# Altium PCB riego.PcbDoc
Units mm, origin at the board's own origin, x right, y up, seen from the top; angles counter-clockwise.
Board outline 75.31 x 78.36 mm, 2 copper layers (Top Layer, Bottom Layer); 81 components, 63 nets, 286 pads, 47 vias.
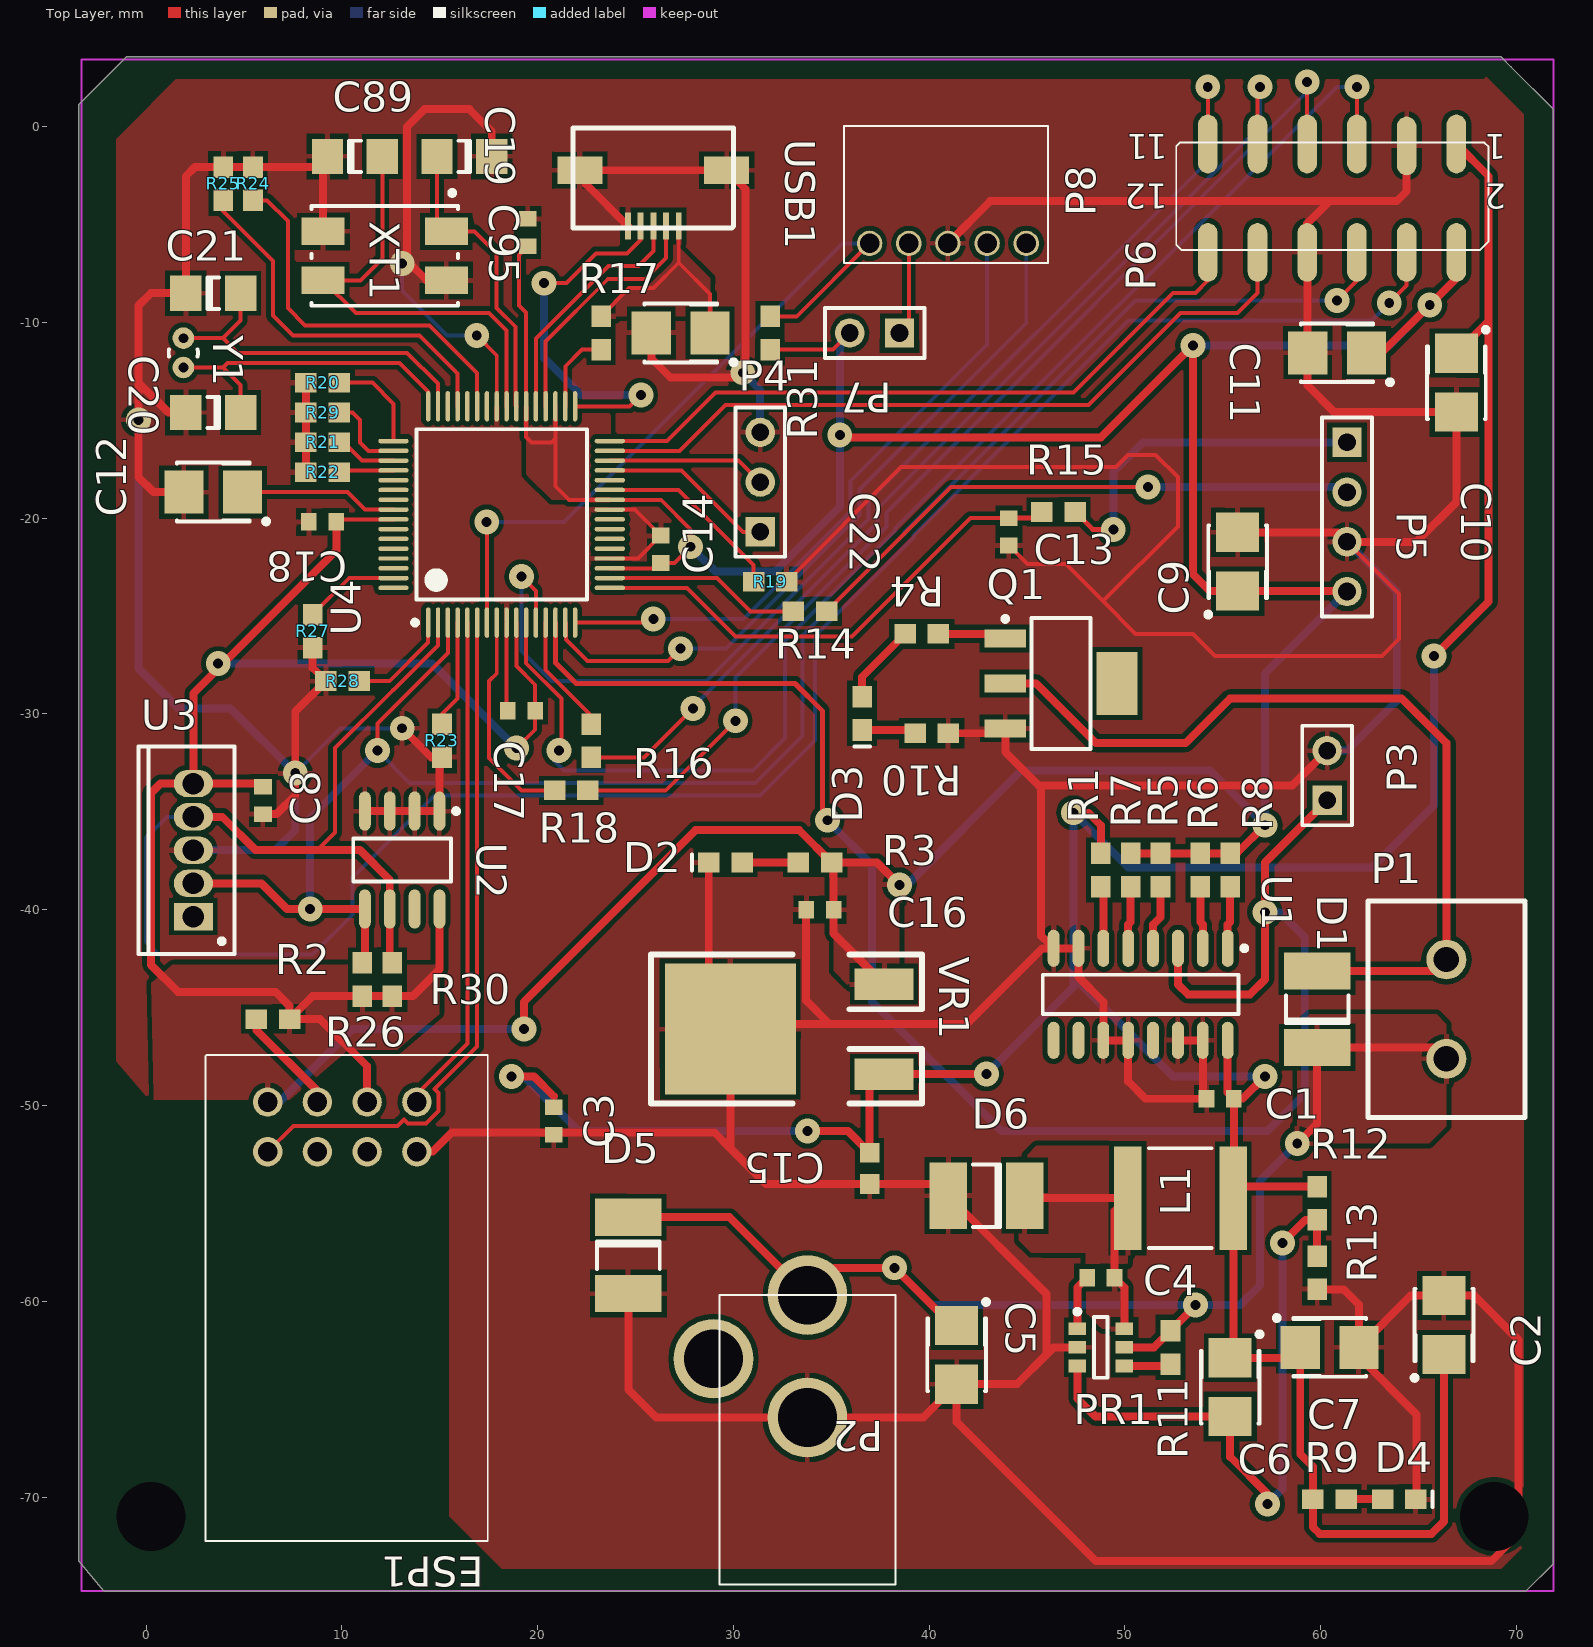
[diagram p0: Top Layer view]
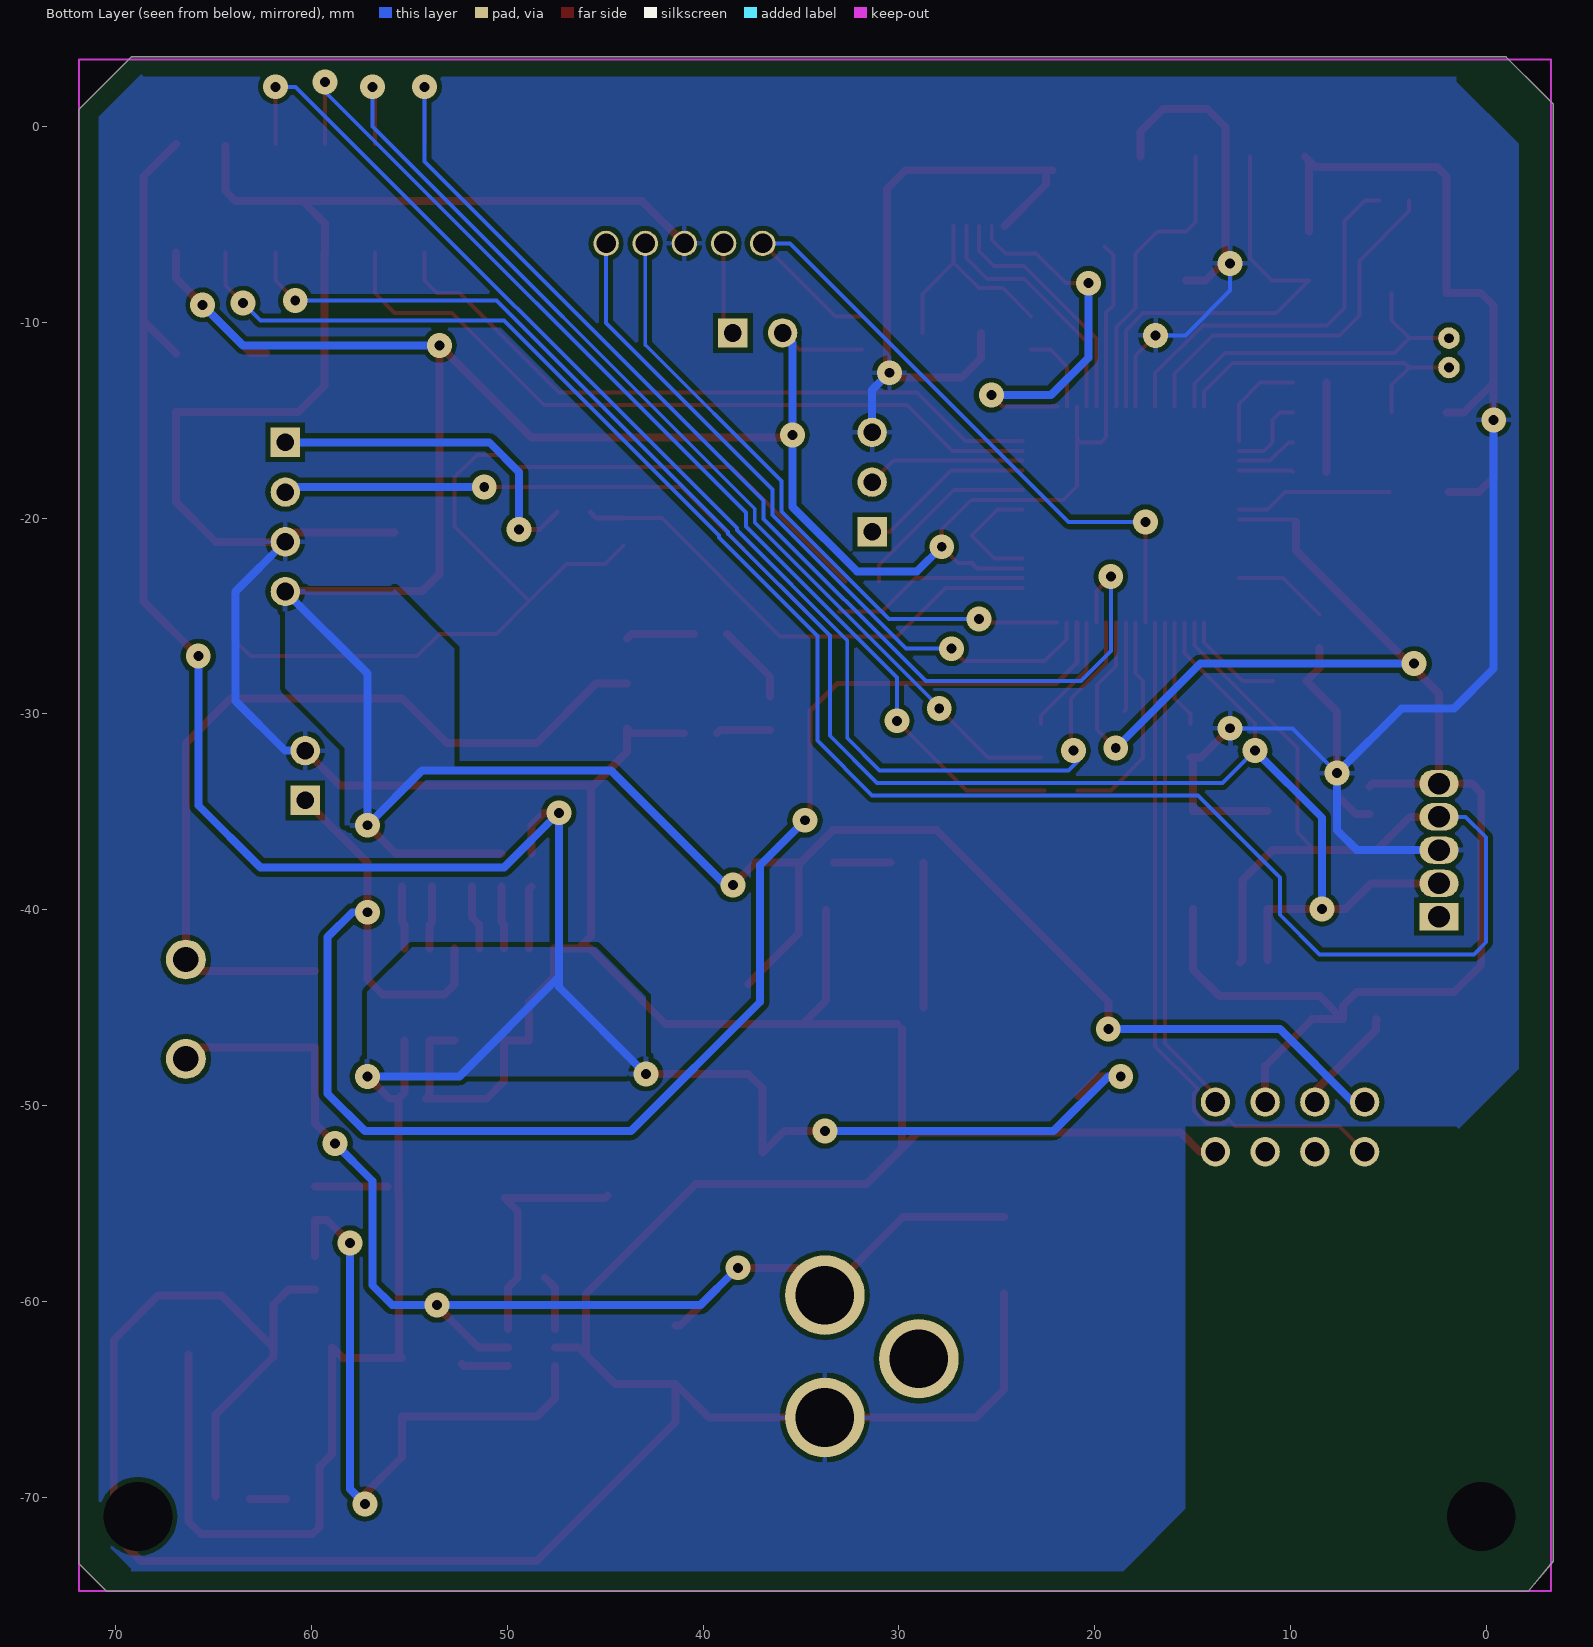
[diagram p1: Bottom Layer view, seen from below]

## Layer stack, top to bottom
Top Layer: signal copper 0.0356
Dielectric: dielectric 0.32, FR-4, Dk 4.8
Bottom Layer: signal copper 0.0356

## Board outline
-2.159,-74.803 70.485,-74.803 71.882,-73.406 71.882,0.889 69.723,3.048 69.215,3.556 11.557,3.556 -1.016,3.556 -2.921,1.651 -3.429,1.143 -3.429,-73.279

## Design rules (kind name [scope] priority, off if disabled: settings)
Clearance [All] p1: gap=0.254
ComponentClearance [All] p1: gap=0.254 collisioncheckmode=3 verticalgap=0 showdistances=FALSE
HoleSize [All] p1: absolutevalues=TRUE maxlimit=3.048 minlimit=0.025 maxpercent=80.000 minpercent=20.000
MinimumSolderMaskSliver [All] p1 off: minsoldermaskwidth=0.254
PolygonConnect [All] p1: connectstyle=Relief reliefconductorwidth=0.254 reliefentries=4 polygonreliefangle="90 Angle"
RoutingVias [All] p1: holewidth=0.254 width=1.27 viastyle="Through Hole" minholewidth=0.254 minwidth=0.508 maxholewidth=0.508 maxwidth=2.032
SilkToSilkClearance [All] p1 off: silktosilkclearance=0.254
SilkscreenOverComponentPads [All] p1 off: minsilkscreentomaskgap=0.254
SolderMaskExpansion [All] p1: expansion=0.102
TestPointUsage [All] p1: valid=0 allowmultiple=FALSE
Testpoint [All] p1: side=15 testpointundercomponent=TRUE minsize=1.016 maxsize=2.54 preferedsize=1.524 minholesize=0 maxholesize=1.016 preferedholesize=0.813 testpointgrid=0.025 style=1023 order=0123456789
Width Width_1 [InComponent(U1)] p1: maxlimit=0.254 minlimit=0.203 preferedwidth=0.203
Width [All] p2: maxlimit=0.508 minlimit=0.203 preferedwidth=0.254
19 further rules are at their usual default settings.

## Components (designator, comment, footprint, x,y, rotation, side; value= is the part's Value field where it differs from the comment)
C1 "Cap Semi" CAPC1608L 54.864,-49.657 r0 top
C2 "" TC3528-1411 66.294,-61.214 r90 top
C3 "Cap Semi" CAPC1608L 20.828,-50.8 r90 top
C4 "Cap Semi" CAPC1608L 48.768,-58.801 r180 top
C5 "" TC3528-1411 41.402,-62.738 r270 top
C6 "" TC3528-1411 55.372,-64.389 r270 top
C7 "" TC3528-1411 60.452,-62.357 r0 top
C8 "Cap Semi" CAPC1608L 5.969,-34.417 r90 top
C9 "" TC3528-1411 55.753,-22.225 r90 top
C10 "" TC3528-1411 66.929,-13.081 r270 top
C11 "" TC3528-1411 60.833,-11.557 r180 top
C12 "" TC3528-1411 3.429,-18.669 r180 top
C13 "Cap Semi" CAPC1608L 44.069,-20.701 r90 top
C14 "Cap Semi" CAPC1608L 26.289,-21.59 r270 top
C15 "C_VDD" CAPC1608N 36.957,-53.213 r270 top
C16 "C_VDD" CAPC1608L 34.417,-40.005 r180 top
C17 "Cap Semi" CAPC1608L 19.177,-29.845 r0 top
C18 "Cap Semi" CAPC1608L 9.017,-20.193 r0 top
C19 "Cap Semi" CAPC1608L 19.489,-5.415 r270 top
C20 "Cap Semi" C1206 3.429,-14.605 r180 top
C21 "Cap Semi" C1206 3.429,-8.509 r0 top
C22 "" TC3528-1411 27.305,-10.541 r180 top
C89 "Cap Semi" C1206 10.668,-1.524 r0 top
C95 "Cap Semi" C1206 16.256,-1.524 r180 top
D1 "Diode" CD4532-1812 59.817,-45.085 r270 top
D2 "Ledred" CD1608-0603 29.591,-37.592 r180 top
D3 "Ledred" CD1608-0603 36.576,-29.972 r270 top
D4 "Ledgreen" CD1608-0603 64.008,-70.104 r0 top
D5 "D Zener" CD4532-1812 24.638,-57.658 r90 top
D6 "B230A" CD4532-1812 42.926,-54.61 r0 top
ESP1 "ESP8266" ESP8266 12.192,-70.104 r270 top
L1 "774-2720" INDC5750N 52.832,-54.737 r0 top
P1 "pump" Headerx2_5.08 66.421,-45.085 r90 top
P2 "Supply" JACK_POWER 33.782,-59.69 r270 top
P3 "LDR" HDR1X2 60.325,-34.417 r90 top
P4 "Debug" HDR1X3 31.369,-20.701 r90 top
P5 "Soil_meas" HDR1X4 61.341,-16.129 r270 top
P6 "Header 6X2" HEADER_SMD_6x2 66.929,-0.889 r180 top
P7 "jumper" HDR1X2 38.481,-10.541 r180 top
P8 "Programador" Header_prog 36.957,-5.969 r0 top
PR1 "AP5100" SOT26A-6L 48.768,-62.357 r0 top
Q1 "MJE340" SOT223-4L 46.736,-28.448 r0 top
R1 "Res3" J1-0603 48.768,-37.973 r90 top
R2 "Res3" J1-0603 6.477,-45.593 r0 top
R3 "Res3" J1-0603 34.163,-37.592 r0 top
R4 "Res3" J1-0603 39.624,-25.908 r0 top
R5 "Res3" J1-0603 51.816,-37.973 r90 top
R6 "Res3" J1-0603 53.848,-37.973 r90 top
R7 "Res3" J1-0603 50.292,-37.973 r90 top
R8 "Res3" J1-0603 55.372,-37.973 r90 top
R9 "Res3" J1-0603 60.452,-70.104 r0 top
R10 "Res3" J1-0603 40.132,-30.988 r180 top
R11 "Res3" J1-0603 52.324,-62.357 r90 top
R12 "Res3" J1-0603 59.817,-54.991 r90 top
R13 "Res3" J1-0603 59.817,-58.547 r90 top
R14 "Res3" J1-0603 33.909,-24.765 r180 top
R15 "Res3" J1-0603 46.609,-19.685 r180 top
R16 "Res3" J1-0603 22.733,-31.369 r90 top
R17 "Res3" J1-0603 23.241,-10.541 r90 top
R18 "Res3" J1-0603 21.717,-33.909 r0 top
R19 "Res3" J1-0603 31.877,-23.241 r0 top
R20 "Res3" J1-0603 9.017,-13.081 r180 top
R21 "Res3" J1-0603 9.017,-16.129 r180 top
R22 "Res3" J1-0603 9.017,-17.653 r180 top
R23 "Res3" J1-0603 15.113,-31.369 r90 top
R24 "Res3" J1-0603 5.461,-2.921 r90 top
R25 "Res3" J1-0603 3.937,-2.921 r90 top
R26 "Res3" J1-0603 11.049,-43.561 r270 top
R27 "Res3" J1-0603 8.509,-25.781 r270 top
R28 "Res3" J1-0603 10.033,-28.321 r180 top
R29 "Res3" J1-0603 9.017,-14.605 r180 top
R30 "Res3" J1-0603 12.573,-43.561 r270 top
R31 "Res3" J1-0603 31.877,-10.541 r90 top
U1 "827-0361" SO16_L 50.8,-44.323 r270 top
U2 "M24C02MN6" SOP8_N 13.081,-37.465 r270 top
U3 "TC74A2-3.3VAT" TO-220-AT5 2.413,-36.957 r90 top
U4 "PIC24FJ64GB106-I/PT" TQFP-PT64_L 18.161,-19.812 r90 top
USB1 "Micro_USB" micro_usb 25.908,-5.08 r180 top
VR1 "751-5192" DPAK 29.845,-46.101 r0 top
XT1 "XTAL_SMD" 12SMXB-14SMX 12.192,-6.604 r180 top
Y1 "32.768" BCY-W2/D1.5 1.905,-11.557 r180 top

## Footprints (in the part's own frame and the unit in brackets; to place one, negate y for a bottom-side part, rotate by r counter-clockwise, add the part's x,y. Pads: shape width x height; smd on the part's side, far side on the other; paste and mask are expansions set on the pad)
12SMXB-14SMX [mm] "Quartz Crystal, SM; Body 7.5 x 5.1 mm (LxW max)"
  rect 2.2x1.4 smd: 1(-3.15,-1.25) 2(-3.15,1.25) 3(3.15,1.25) 4(3.15,-1.25)
  silkscreen extent -3.75,-3.34 3.75,2.55
BCY-W2/D1.5 [mm] "Crystal, Thru-Hole; 2 Leads; Body 1.5 x 5.1 mm (Dia.xH)"
  round 1.1 hole 0.5: 1(0,0.75) 2(0,-0.75)
  silkscreen extent -0.75,-0.18 0.75,0.18
C1206 [mm] "Chip Capacitor; Body 3.2 x 1.6 mm (LxW typ)"
  rect 1.6x1.8 smd: 1(-1.4,0) 2(1.4,0)
  silkscreen extent -0.3,-0.8 0.3,0.8
CAPC1608L [mm] "Chip Capacitor, Body 1.6x0.8mm, IPC High Density"
  rect 0.8x0.9 smd: 1(-0.7,0) 2(0.7,0)
  body extent -0.87,-0.48 0.87,0.48, height 0.85
CAPC1608N [mm] "Chip Capacitor, Body 1.6x0.8mm, IPC Medium Density"
  rect 1x1 smd: 1(-0.8,0) 2(0.8,0)
  body extent -0.87,-0.48 0.87,0.48, height 0.85
CD1608-0603 [mm] "Chip Diode; Body 1.6 x 0.8 mm (LxW typ)"
  rect 1.1x1 smd: 1(-0.85,0) 2(0.85,0)
  silkscreen extent 1.7,-0.4 1.7,0.4
CD4532-1812 [mm] "Chip Diode; Body 4.5 x 3.2 mm (LxW typ)"
  rect 1.9x3.4 smd: 1(-1.95,0) 2(1.95,0)
  silkscreen extent -0.7,-1.6 0.7,1.6
DPAK [mm]
  rect 3x1.6 smd: 1(7.85,-2.3) 3(7.85,2.3)
  rect 6.7x6.7 smd: 2(0,0)
  silkscreen extent -4.06,-3.81 9.78,3.81
ESP8266 [mm] "ESP8266"
  round 1.5 hole 1: 1(-17.74,-5.98) 2(-20.28,-5.98) 3(-17.74,-3.44) 4(-20.28,-3.44) 5(-17.74,-0.9) 6(-20.28,-0.9) 7(-17.74,1.64) 8(-20.28,1.64)
  silkscreen extent -22.67,-9.16 2.15,5.26
HDR1X2 [mm] "Connector; Header; 2 Position"
  rect 1.5x1.5 hole 0.9: 1(0,0)
  round 1.5 hole 0.9: 2(2.54,0)
  silkscreen extent -1.27,-1.27 3.81,1.27
HDR1X3 [mm] "Connector; Header; 3 Position"
  rect 1.5x1.5 hole 0.9: 1(0,0)
  round 1.5 hole 0.9: 2(2.54,0) 3(5.08,0)
  silkscreen extent -1.27,-1.27 6.35,1.27
HDR1X4 [mm] "Connector; Header; 4 Position"
  rect 1.5x1.5 hole 0.9: 1(0,0)
  round 1.5 hole 0.9: 2(2.54,0) 3(5.08,0) 4(7.62,0)
  silkscreen extent -1.27,-1.27 8.89,1.27
Header_prog [mm]
  round 1.3 hole 1: 1(0,0) 2(2,0) 3(4,0) 4(6,0) 5(8,0)
  silkscreen extent -1.32,-1 9.1,6
HEADER_SMD_6x2 [mm]
  oval 1x3 smd: 1(0,0) 2(0,5.54) 3(2.54,0.1) 4(2.54,5.54) 5(5.08,0) 6(5.08,5.54) 7(7.62,0) 8(7.62,5.54) 9(10.16,0) 10(10.16,5.54) 11(12.7,0) 12(12.7,5.54)
  silkscreen extent -1.65,-0.07 14.31,5.42
Headerx2_5.08 [mil] "408-7871 rs"
  round 80 hole 51.18: 1(-100,0) 2(100,0)
  silkscreen extent -218,-157 218,157
INDC5750N [mm] "Chip Inductor, Body 5.7x5.0mm, IPC Medium Density"
  rect 1.4x5.3 smd: 1(-2.7,0) 2(2.7,0)
  silkscreen extent -1.6,-2.55 1.6,2.55, body extent -2.95,-2.65 2.95,2.65, height 1.9
J1-0603 [mm] "Chip Resistor; Body 1.6 x 0.8 mm (LxW typ)"
  rect 1.1x1 smd: 1(-0.85,0) 2(0.85,0)
JACK_POWER [mm]
  round 4.064 hole 3: 0(3.25,-4.8) 1(6.25,0) 2(0,0)
  silkscreen extent 0,-4.5 14.78,4.5
micro_usb [mm] "714-2344"
  rect 0.305x1.4 smd: 1(-1.3,0) 2(-0.65,0) 3(0,0) 4(0.65,0) 5(1.3,0)
  rect 2.3x1.4 smd: 6(-3.75,-2.85) 7(3.75,-2.85)
  silkscreen extent -4.1,-5 4.1,0.1
SO16_L [mm] "SOIC, 16-Leads, Body 9.9x3.9mm, Pitch 1.27mm, IPC High Density"
  oval 1.9x0.6 smd: 1(-2.35,4.445) 2(-2.35,3.175) 3(-2.35,1.905) 4(-2.35,0.635) 5(-2.35,-0.635) 6(-2.35,-1.905) 7(-2.35,-3.175) 8(-2.35,-4.445) 9(2.35,-4.445) 10(2.35,-3.175) 11(2.35,-1.905) 12(2.35,-0.635) 13(2.35,0.635) 14(2.35,1.905) 15(2.35,3.175) 16(2.35,4.445)
  silkscreen extent -2.47,-5 1,5.42, body extent -1.95,-4.95 1.95,4.95, height 1.75
SOP8_N [mm] "SOIC, 8-Leads, Body 4.9x3.9mm, Pitch 1.27mm, IPC Medium Density"
  oval 2x0.6 smd: 1(-2.5,1.905) 2(-2.5,0.635) 3(-2.5,-0.635) 4(-2.5,-1.905) 5(2.5,-1.905) 6(2.5,-0.635) 7(2.5,0.635) 8(2.5,1.905)
  silkscreen extent -2.62,-2.5 1.1,2.88, body extent -2,-2.5 2,2.5, height 1.75
SOT26A-6L [mm] "SOT23, 6-Leads, Body 2.9x1.7mm, Pitch 0.95mm, Lead Span 2.8mm, IPC High Density"
  rect 0.9x0.65 smd: 1(-1.2,0.95) 2(-1.2,0) 3(-1.2,-0.95) 4(1.2,-0.95) 5(1.2,0) 6(1.2,0.95)
  silkscreen extent -1.32,-1.55 0.35,1.95, body extent -0.9,-1.55 0.9,1.55, height 1.45
SOT223-4L [mm] "SOT223, 4-Leads, Body 6.5x3.5mm, Pitch 2.3mm, Lead Span 7mm, IPC High Density"
  rect 2.1x0.9 smd: 1(-2.85,2.3) 2(-2.85,0) 3(-2.85,-2.3)
  rect 2.1x3.2 smd: 4(2.85,0)
  silkscreen extent -2.97,-3.35 1.5,3.42, body extent -1.85,-3.35 1.85,3.35, height 1.8
TC3528-1411 [mm] "Capacitor, SM Tantalum; Body 3.5 x 2.8 mm (LxW typ)"
  rect 2x2.2 smd: 1(-1.5,0) 2(1.5,0)
  silkscreen extent -2.82,-1.5 1.85,1.62
TO-220-AT5 [mm] "TO, Thru-Hole, Vertical, Heatsink Mounted; 5 In-Line Leads; Pitch 1.70 mm"
  rect 1.4x2 hole 1.1: 1(-3.4,0)
  oval 1.4x2 hole 1.1: 2(-1.7,0) 3(0,0) 4(1.7,0) 5(3.4,0)
  silkscreen extent -5.3,-2.1 5.3,2.8, body extent -5.35,-2.15 5.35,2.85, height 20.6
TQFP-PT64_L [mm] "Thin QFP, 64-Leads, Body 10x10mm, Pitch 0.5mm, IPC High Density"
  oval 1.55x0.229 smd: 1(-5.525,3.75) 2(-5.525,3.25) 3(-5.525,2.75) 4(-5.525,2.25) 5(-5.525,1.75) 6(-5.525,1.25) 7(-5.525,0.75) 8(-5.525,0.25) 9(-5.525,-0.25) 10(-5.525,-0.75) 11(-5.525,-1.25) 12(-5.525,-1.75) 13(-5.525,-2.25) 14(-5.525,-2.75) 15(-5.525,-3.25) 16(-5.525,-3.75) 33(5.525,-3.75) 34(5.525,-3.25) 35(5.525,-2.75) 36(5.525,-2.25) 37(5.525,-1.75) 38(5.525,-1.25) 39(5.525,-0.75) 40(5.525,-0.25) 41(5.525,0.25) 42(5.525,0.75) 43(5.525,1.25) 44(5.525,1.75) 45(5.525,2.25) 46(5.525,2.75) 47(5.525,3.25) 48(5.525,3.75)
  oval 0.229x1.55 smd: 17(-3.75,-5.525) 18(-3.25,-5.525) 19(-2.75,-5.525) 20(-2.25,-5.525) 21(-1.75,-5.525) 22(-1.25,-5.525) 23(-0.75,-5.525) 24(-0.25,-5.525) 25(0.25,-5.525) 26(0.75,-5.525) 27(1.25,-5.525) 28(1.75,-5.525) 29(2.25,-5.525) 30(2.75,-5.525) 31(3.25,-5.525) 32(3.75,-5.525) 49(3.75,5.525) 50(3.25,5.525) 51(2.75,5.525) 52(2.25,5.525) 53(1.75,5.525) 54(1.25,5.525) 55(0.75,5.525) 56(0.25,5.525) 57(-0.25,5.525) 58(-0.75,5.525) 59(-1.25,5.525) 60(-1.75,5.525) 61(-2.25,5.525) 62(-2.75,5.525) 63(-3.25,5.525) 64(-3.75,5.525)
  silkscreen extent -5.65,-4.35 4.35,4.55, body extent -5,-5 5,5, height 1.2

## Part data
C1 C3 C4 C8 C13 C14 C17 C18 C19 C20 C21 C89 C95: "Capacitor (Semiconductor SIM Model)"
C2 C5 C6 C7 C9 C10 C11 C12 C15 C16 C22: library part "Cap Pol1", "Polarized Capacitor (Radial)"
D1: "Default Diode"
D2 D3 D4: library part LED3, "Typical BLUE SiC LED"
D5: "Zener Diode"
D6: library part "D Zener", "Zener Diode"
L1: library part Inductor, "Inductor"
P1 P2 P3 P7: library part "Header 2", "Header, 2-Pin"
P4: library part "Header 3", "Header, 3-Pin"
P5: library part "Header 4", "Header, 4-Pin"
P6: "Header, 6-Pin, Dual row"
P8: library part "Header 5", "Header, 5-Pin"
PR1: "Step down converter (751-3005)"
Q1: "Complementary Silicon Power Transistor"
R1 R2 R3 R4 R5 R6 R7 R8 R9 R10 R11 R12 R13 R14 R15 R16 R17 R18 R19 R20 R21 R22 R23 R24 R25 R26 R27 R28 R29 R30 R31: "Resistor"
U1: library part M74HC4052M1R, "Analog Multiplexer/Demultiplexer Dual 4-Channel"
U2: "2Kbit Serial I²C Bus EEPROM"
U3: "Tiny Serial Digital Thermal Sensor, 5-Pin TO-220, Extended Temperature"
U4: "General Purpose 16-Bit Flash Microcontroller with USB On-The-Go, 64KB Flash, 16KB SRAM, 64-Pin TQFP, Industrial Temperature"
VR1: library part "Volt Reg", "Voltage Regulator"
Y1: library part XTAL, "Crystal Oscillator"

## Free pads (board coordinates)
  round 1.3 hole 3.51: 0(0.254,-70.993) 1(68.864,-70.993)

## Via types
v1: diameter 1.27, hole 0.508, Top Layer to Bottom Layer, 47 vias

## Nets (pads, with @x,y where several pads share a name; then routed paths per layer and width w, separated by ;. In a path a pad name is that pad's centre, name@x,y a point inside that pad or via, vN(x,y) a via of type N, cw(c..) or ccw(c..) an arc to the next point about the centre after c; other vN are vias at no path point)
\M\C\L\R\: P8.1 R31.2 U4.7 | length 37.2
  Top Layer w0.203: v1(17.399,-20.193) 17.411,-20.205 U4.7 ; R31.2 33.235,-9.691 P8.1
  Bottom Layer w0.203: v1(17.399,-20.193) 21.336,-20.193 35.56,-5.969 P8.1
\M\U\X\_\E\N\: R1.1 U1.6 | length 3.2
  Top Layer w0.406: R1.1 48.895,-38.95 U1.6
A1_EXP: P6.11 U4.12 | length 60.4
  Top Layer w0.203: v1(19.177,-22.987) 19.911,-23.721 U4.12 ; P6.11 v1(54.229,2.032)
  Bottom Layer w0.203: v1(19.177,-22.987) 19.177,-26.797 20.701,-28.321 28.626,-28.321 36.906,-20.041 36.906,-19.101 54.229,-1.778 v1(54.229,2.032)
A2_EXP: P6.5 U4.11 | length 69.6
  Top Layer w0.203: U4.11 19.411,-27.412 21.209,-29.21 21.209,-31.75 v1(21.082,-31.877) ; P6.5 v1(61.849,2.032)
  Bottom Layer w0.203: v1(21.082,-31.877) 20.828,-32.131 20.828,-32.385 21.336,-32.893 30.988,-32.893 32.639,-31.242 32.639,-26.248 38.278,-20.609 38.278,-20.512 60.821,2.032 v1(61.849,2.032)
AO_SOIL: P5.1 R15.1 | length 17.8
  Top Layer w0.254: R15.1 48.348,-20.574 v1(49.403,-20.574)
  Bottom Layer w0.406: v1(49.403,-20.574) 49.403,-17.653 50.927,-16.129 P5.1
AP5100_FB: C6.2 PR1.3 R12.1 R13.2 | length 32.9
  Top Layer w0.406: PR1.3 47.568,-64.967 48.49,-65.889 C6.2 55.372,-67.945 57.277,-69.85 v1(57.277,-70.358) ; v1(58.039,-57.023) 59.221,-55.841 R12.1 R13.2
  Bottom Layer w0.406: v1(57.277,-70.358) 58.039,-69.596 v1(58.039,-57.023)
DIO1_EXP: P6.7 R18.2 | length 56.9
  Top Layer w0.203: R18.2 26.543,-33.909 v1(30.099,-30.353) ; P6.7 v1(59.309,2.286)
  Bottom Layer w0.203: v1(30.099,-30.353) 30.099,-28.142 37.821,-20.42 37.821,-19.71 59.309,1.778 v1(59.309,2.286)
DIO2_EXP: P6.9 R16.1 | length 53
  Top Layer w0.203: R16.1 25.439,-32.219 v1(27.94,-29.718) ; P6.9 56.769,1.905 v1(56.896,2.032)
  Bottom Layer w0.203: v1(27.94,-29.718) 27.94,-29.654 37.363,-20.231 37.363,-19.521 56.896,0.012 v1(56.896,2.032)
DO_SOIL: P5.2 R14.1 | length 29.3
  Top Layer w0.203: R14.1 41.109,-18.415 v1(51.181,-18.415)
  Bottom Layer w0.406: v1(51.181,-18.415) 61.087,-18.415 P5.2
ESP_RX: ESP1.8 U4.5 | length 25.1
  Top Layer w0.203: ESP1.8@13.843,-49.403 16.411,-46.835 U4.5
ESP_TX: ESP1.1 U4.6 | length 35.7
  Top Layer w0.203: ESP1.1 7.522,-51.054 12.839,-51.054 13.169,-50.724 13.374,-50.93 14.29,-50.93 14.938,-50.282 14.938,-49.366 14.732,-49.161 16.911,-46.982 U4.6
GND: C1.1 C2.2 C3.1 C5.2 C7.2 C8.1 C9.2 C10.2 C11.2 C12.2 C13.1 C14.1 C15.2 C16.2 C17.1 C18.1 C19.1 C20.2 C21.1 C22.2 C89.1 C95.1 D2.2 D4.2 D5.1 D6.1 ESP1.7 P2.1 P3.2 P4.3 P5.3 P6.3 P6.8 P8.3 PR1.2 Q1.3 R10.1 R13.1 R19.2 R20.2 R21.2 R22.2 R23.1 R24.2 R25.2 R27.2 R28.2 R29.2 U1.7 U1.8 U1.11 U1.12 U1.14 U1.15 U2.1 U2.2 U2.3 U2.4 U3.3 U4.9 U4.20 U4.25 U4.41 USB1.5 USB1.6 USB1.7 VR1.2 XT1.2 XT1.4 | length 524.3
  Top Layer w0.203: v1(13.081,-6.985) v1@13.325,-6.741 ; v1(16.891,-10.668) 17.911,-11.688 U4.41 ; U4.9 18.411,-29.779 C17.1 ; U4.20 25.117,-22.062 C14.1 25.496,-20.097 24.961,-19.562 U4.25 ; R19.2 38.569,-17.399 49.53,-17.399 50.165,-16.764 51.562,-16.764 52.705,-17.907 52.705,-20.42 48.882,-24.244 ; C13.1 45.02,-22.352 46.99,-22.352 48.882,-24.244 ; P5.3 64.008,-23.876 64.008,-26.162 63.119,-27.051 54.61,-27.051 53.467,-25.908 50.546,-25.908 48.882,-24.244
  Top Layer w0.406: C12.2 0.381,-18.669 -0.381,-17.907 v1(-0.381,-14.986) -0.381,-13.081 ; C20.2 1.143,-14.605 -0.381,-13.081 ; C8.1 6.666,-35.117 7.62,-34.163 v1(7.62,-33.02) 7.62,-29.884 R28.2 8.509,-27.647 R27.2 ; R22.2 R21.2 R29.2 R20.2 ; XT1.4 9.042,-1.75 C89.1 8.721,-2.071 R24.2 R25.2 2.501,-2.071 2.029,-2.543 C21.1 0.254,-8.509 -0.381,-9.144 -0.381,-13.081 ; U2.4 U2.3 U2.2 U2.1 R23.1@14.986,-32.219 ; v1(13.081,-30.734) 14.566,-32.219 R23.1@14.986,-32.219 ; ESP1.7 14.63,-52.364 15.621,-51.373 29.021,-51.373 29.845,-52.197 ; R23.1 R23.1@14.986,-32.219 ; XT1.2 14.331,-7.854 13.325,-6.848 13.325,-6.741 13.325,-0.01 14.224,0.889 16.51,0.889 17.656,-0.257 C95.1 ; USB1.7 USB1.6 30.607,-3.179 30.607,-12.192 29.972,-12.827 26.797,-12.827 25.805,-11.835 C22.2 ; USB1.7@22.479,-2.551 22.479,-2.951 USB1.5 ; D5.1 24.638,-64.516 26.062,-65.94 P2.1 39.7,-65.94 C5.2 ; VR1.2@28.741,-44.997 D2.2 ; VR1.2 29.845,-52.197 ; VR1.2@30.099,-45.847 34.925,-45.847 ; C16.2 33.717,-44.639 34.925,-45.847 ; P8.3 43.116,-3.81 60.452,-3.81 ; R10.1 43.646,-30.988 Q1.3 43.886,-31.948 45.593,-33.655 ; PR1.2 46.355,-62.357 45.992,-62.72 ; U1.14 U1.15 53.975,-49.468 C1.1 51.054,-49.657 50.165,-48.768 U1.12 U1.11 48.895,-44.704 47.625,-43.434 U1.7 U1.8 ; C9.2 60.857,-20.725 P5.3 64.897,-21.209 66.929,-19.177 C10.2 60.682,-14.581 59.333,-13.232 C11.2 59.333,-6.453 P6.8 59.309,-4.953 60.452,-3.81 ; R13.1 61.175,-59.397 61.952,-60.174 C7.2 ; P3.2 58.547,-33.655 45.593,-33.655 ; P6.3 64.389,-3.302 63.881,-3.81 60.452,-3.81 ; D4.2@64.897,-69.977 64.897,-65.786 61.952,-62.841 C7.2 ; 29.845,-52.197 31.661,-54.013 C15.2 40.379,-54.013 D6.1 45.992,-59.626 45.992,-62.72 ; 34.925,-45.847 41.91,-45.847 45.784,-41.973 U1.8 ; C5.2 44.474,-64.238 45.992,-62.72 ; C5.2 41.402,-66.167 48.514,-73.279 68.707,-73.279 70.104,-71.882 70.104,-61.976 67.842,-59.714 C2.2 64.595,-59.714 C7.2 ; 45.593,-33.655 45.72,-33.782 45.72,-41.338 U1.8
  Bottom Layer w0.203: v1(7.62,-33.02) 9.906,-30.734 v1(13.081,-30.734) ; v1(13.081,-6.985) 13.081,-8.382 15.367,-10.668 v1(16.891,-10.668)
  Bottom Layer w0.406: v1(-0.381,-14.986) -0.381,-27.686 1.651,-29.718 4.318,-29.718 v1(7.62,-33.02) 7.62,-35.941 6.604,-36.957 U3.3 ; v1(30.48,-12.573) 31.369,-13.462 P4.3 ; P3.2 61.341,-31.877 63.881,-29.337 63.881,-23.749 P5.3
LDR_AN: P3.1 U1.3 U4.14 | length 86.1
  Top Layer w0.254: U4.14 20.911,-27.388 21.971,-28.448 33.147,-28.448 34.544,-29.845 34.544,-35.179 v1(34.798,-35.433)
  Top Layer w0.406: U1.3 52.705,-43.815 53.213,-44.323 56.388,-44.323 57.15,-43.561 v1(57.15,-40.132) 57.15,-37.592 P3.1
  Bottom Layer w0.406: v1(34.798,-35.433) 37.084,-37.719 37.084,-44.704 43.688,-51.308 57.277,-51.308 59.182,-49.403 59.182,-41.402 57.912,-40.132 v1(57.15,-40.132)
NetC4_1: C4.1 D6.2 L1.1 PR1.6 | length 12.5
  Top Layer w0.406: D6.2 45.003,-54.737 L1.1 49.468,-55.401 C4.1 49.968,-59.301 PR1.6
NetC4_2: C4.2 PR1.1 | length 2.8
  Top Layer w0.406: PR1.1 47.568,-59.301 C4.2
NetC12_1: C12.1 U4.56 | length 8.1
  Top Layer w0.203: C12.1 10.287,-18.669 11.18,-19.562 U4.56
NetC13_2: C13.2 R15.2 U4.17 | length 25.7
  Top Layer w0.203: U4.17 27.626,-23.562 30.099,-26.035 36.068,-26.035 42.102,-20.001 C13.2
  Top Layer w0.254: C13.2 45.443,-20.001 R15.2
NetC22_1: C22.1 R17.2 USB1.1 | length 11.2
  Top Layer w0.203: R17.2 24.677,-8.255 25.908,-8.255 27.208,-6.955 ; USB1.1 27.208,-6.955 ; C22.1 28.805,-8.552 27.208,-6.955
NetD1_1: D1.1 P1.2 Q1.2 | length 43.6
  Top Layer w0.406: Q1.2 45.466,-28.448 48.514,-31.496 53.086,-31.496 55.372,-29.21 64.135,-29.21 66.421,-31.496 P1.2 65.831,-43.135 D1.1
NetD2_1: D2.1 R3.1 | length 2.9
  Top Layer w0.406: D2.1 R3.1
NetD3_2: D3.2 R10.2 | length 2.8
  Top Layer w0.406: D3.2 39.116,-30.822 R10.2
NetD4_1: D4.1 R9.2 | length 1.9
  Top Layer w0.406: R9.2 D4.1
NetESP1_4: ESP1.4 R2.1 | length 5.6
  Top Layer w0.406: R2.1@5.577,-45.643 R2.1 5.627,-46.14 8.752,-49.265 ESP1.4
NetP7_1: P7.1 P8.2 | length 4.8
  Top Layer w0.203: P7.1 38.957,-10.065 P8.2
NetPR1_4: PR1.4 R11.1 | length 2.4
  Top Layer w0.406: PR1.4 52.224,-63.307 R11.1
NetQ1_1: Q1.1 R4.2 | length 3.5
  Top Layer w0.406: R4.2 43.646,-25.908 Q1.1
NetR5_1: R5.1 U1.4 | length 3.3
  Top Layer w0.406: U1.4 51.435,-40.767 51.816,-40.386 R5.1
NetR6_1: R6.1 U1.2 | length 3.2
  Top Layer w0.406: R6.1 53.848,-40.64 53.975,-40.767 U1.2
NetR7_1: R7.1 U1.5 | length 3.2
  Top Layer w0.406: U1.5 50.165,-40.767 50.292,-40.64 R7.1
NetR8_1: R8.1 U1.1 | length 3.2
  Top Layer w0.406: U1.1 55.245,-40.767 55.372,-40.64 R8.1
NetR14_2: R14.2 U4.18 | length 10.1
  Top Layer w0.203: U4.18 29.158,-23.062 30.861,-24.765 R14.2
NetR16_2: R16.2 U4.13 | length 6.1
  Top Layer w0.203: U4.13 20.411,-27.765 22.733,-30.087 R16.2
NetR18_1: R18.1 U4.8 | length 11.1
  Top Layer w0.203: U4.8 17.911,-27.936 17.526,-28.321 17.526,-32.258 19.177,-33.909 R18.1
NetR19_1: R19.1 U4.27 | length 9.8
  Top Layer w0.203: U4.27 27.198,-18.562 31.027,-22.391 R19.1
NetR20_1: R20.1 U4.49 | length 5.1
  Top Layer w0.203: R20.1 11.557,-13.081 12.636,-14.16 U4.49
NetR21_1: R21.1 U4.51 | length 3.2
  Top Layer w0.203: R21.1 10.104,-16.129 11.037,-17.062 U4.51
NetR22_1: R22.1 U4.52 | length 2.8
  Top Layer w0.203: R22.1 9.958,-17.562 U4.52
NetR23_2: R23.2 U4.4 | length 5.5
  Top Layer w0.203: R23.2 15.113,-30.011 15.911,-29.213 U4.4
NetR24_1: R24.1 U4.43 | length 19.4
  Top Layer w0.203: R24.1 6.184,-3.771 7.239,-4.826 7.239,-9.271 8.128,-10.16 14.478,-10.16 16.911,-12.593 U4.43
NetR25_1: R25.1 U4.45 | length 19.3
  Top Layer w0.203: R25.1 3.937,-4.318 6.477,-6.858 6.477,-9.652 7.493,-10.668 13.97,-10.668 15.911,-12.609 U4.45
NetR27_1: R27.1 U4.63 | length 4.9
  Top Layer w0.203: R27.1 10.378,-23.062 U4.63
NetR28_1: R28.1 U4.1 | length 5.4
  Top Layer w0.203: R28.1 12.446,-28.321 14.411,-26.356 U4.1
NetR29_1: R29.1 U4.50 | length 4.2
  Top Layer w0.203: R29.1 10.541,-14.605 10.922,-14.986 10.922,-16.129 11.355,-16.562 U4.50
NetU4_33: U4.33 USB1.4 | length 19.7
  Top Layer w0.203: v1(20.32,-8.001) 21.463,-8.001 22.987,-6.477 24.566,-6.477 25.258,-5.785 USB1.4 ; U4.33 24.702,-14.287 v1(25.273,-13.716)
  Bottom Layer w0.406: v1(20.32,-8.001) 20.32,-11.811 22.225,-13.716 v1(25.273,-13.716)
NetU4_36: U4.36 USB1.2 | length 12.9
  Top Layer w0.203: U4.36 20.411,-10.968 23.581,-7.798 25.476,-7.798 26.558,-6.716 USB1.2
NetU4_37: U4.37 USB1.3 | length 12.6
  Top Layer w0.203: U4.37 19.911,-10.822 23.621,-7.112 25.146,-7.112 25.908,-6.35 USB1.3
OSCI: C95.2 U4.39 XT1.1 | length 15.3
  Top Layer w0.203: C95.2 14.856,-4.868 XT1.1 16.784,-5.354 17.907,-6.477 17.907,-9.259 18.881,-10.233 18.881,-14.257 U4.39
OSCO: C89.2 U4.40 XT1.3 | length 23
  Top Layer w0.203: C89.2 12.068,-6.728 10.942,-7.854 XT1.3 10.713,-9.525 17.526,-9.525 18.411,-10.41 U4.40
PGC: P8.5 U4.15 | length 36.8
  Top Layer w0.203: U4.15 21.441,-25.367 21.441,-26.192 22.554,-27.305 26.67,-27.305 v1(27.305,-26.67)
  Bottom Layer w0.203: v1(27.305,-26.67) 29.631,-26.67 36.449,-19.852 36.449,-18.542 44.957,-10.034 P8.5
PGD: P8.4 U4.16 | length 33
  Top Layer w0.203: U4.16 25.717,-25.337 v1(25.908,-25.146)
  Bottom Layer w0.203: v1(25.908,-25.146) 30.508,-25.146 35.992,-19.662 35.992,-18.11 42.957,-11.145 P8.4
PUMP_ENABLE: D3.1 R4.1 | length 4.1
  Top Layer w0.406: D3.1 36.576,-28.106 R4.1
RX_DB: P4.2 U4.30 | length 8.3
  Top Layer w0.203: U4.30 30.27,-17.062 P4.2 P4.2@31.27,-18.062
RX_EXP: P6.12 U4.32 | length 35.4
  Top Layer w0.203: U4.32 26.61,-16.062 29.083,-13.589 47.371,-13.589 52.451,-8.509 53.594,-8.509 54.229,-7.874 P6.12
SCL: P6.4 R30.1 U2.6 U3.4 U4.2 | length 122.8
  Top Layer w0.203: 8.763,-36.957 9.652,-36.068 9.652,-31.75 12.624,-28.778 12.635,-28.778 14.911,-26.503 U4.2 ; v1(63.5,-9.017) 64.389,-8.128 P6.4
  Top Layer w0.406: U3.4 3.888,-35.257 5.588,-36.957 8.763,-36.957 10.922,-36.957 12.446,-38.481 U2.6 12.446,-42.584 R30.1
  Bottom Layer w0.203: U3.4 1.065,-35.257 0,-36.322 0,-41.656 0.635,-42.291 8.509,-42.291 10.541,-40.259 10.541,-38.354 14.732,-34.163 31.369,-34.163 34.163,-31.369 34.163,-26.017 39.192,-20.988 39.192,-20.89 50.177,-9.906 62.611,-9.906 v1(63.5,-9.017)
SDA: P6.6 R26.1 U2.5 U3.2 U4.3 | length 95.3
  Top Layer w0.203: v1(11.811,-31.877) 11.811,-30.48 15.411,-26.88 U4.3 ; v1(60.833,-8.89) 61.849,-7.874 P6.6
  Top Layer w0.406: U3.2 5.891,-38.657 7.199,-39.965 v1(8.382,-39.965) U2.5 R26.1@11.176,-42.584
  Bottom Layer w0.203: v1(11.811,-31.877) 13.462,-33.528 31.115,-33.528 33.528,-31.115 33.528,-26.006 38.735,-20.799 38.735,-20.701 50.546,-8.89 v1(60.833,-8.89)
  Bottom Layer w0.406: v1(8.382,-39.965) 8.382,-35.306 v1(11.811,-31.877)
SOSCI: C21.2 U4.47 Y1.2 | length 17.8
  Top Layer w0.203: Y1.2 3.925,-10.807 ; C21.2 4.829,-9.903 3.925,-10.807 ; U4.47 14.911,-13.133 13.335,-11.557 4.675,-11.557 3.925,-10.807
SOSCO: C20.1 U4.48 Y1.1 | length 16.6
  Top Layer w0.203: Y1.1 3.925,-12.307 ; C20.1 4.829,-13.211 3.925,-12.307 ; U4.48 14.411,-13.522 12.954,-12.065 4.167,-12.065 3.925,-12.307
TX_DB: P4.1 U4.29 | length 9
  Top Layer w0.203: U4.29 27.341,-17.562 30.48,-20.701 P4.1
TX_EXP: P6.10 U4.31 | length 38.5
  Top Layer w0.203: U4.31 27.253,-16.562 29.591,-14.224 48.133,-14.224 52.832,-9.525 55.753,-9.525 56.769,-8.509 P6.10
V_IN: C5.1 D1.2 D5.2 P1.1 P2.2 PR1.5 R11.2 | length 64.8
  Top Layer w0.406: D5.2 29.8,-55.708 P2.2 35.179,-58.293 v1(38.227,-58.293) 41.172,-61.238 C5.1 ; PR1.5 51.474,-62.357 R11.2 53.594,-60.237 v1(53.594,-60.198) ; v1(58.801,-51.943) 59.817,-50.927 D1.2 65.831,-47.035 P1.1
  Bottom Layer w0.406: v1@38.354,-58.293 38.354,-58.42 40.132,-60.198 v1(53.594,-60.198) 55.88,-60.198 56.896,-59.182 56.896,-53.848 v1(58.801,-51.943)
VBUS: R17.1 U4.34 | length 4.2
  Top Layer w0.203: U4.34 21.411,-12.244 22.264,-11.391 R17.1
VCC: C1.2 C2.1 C3.2 C6.1 C7.1 C10.1 C15.1 L1.2 P6.1 R1.2 R9.1 R12.2 U1.16 VR1.1 | length 172.1
  Top Layer w0.406: v1(18.669,-48.514) 19.812,-48.514 20.828,-49.53 ; v1(33.782,-51.308) 35.852,-51.308 C15.1 36.957,-49.139 VR1.1 42.912,-48.401 v1(42.926,-48.387) ; v1(47.371,-35.052) 48.133,-35.052 48.768,-35.687 R1.2 ; U1.16 55.245,-49.338 C1.2 ; L1.2@56.128,-54.141 R12.2 ; v1(57.15,-48.514) 56.007,-49.657 C1.2 ; v1(65.786,-27.051) 68.58,-24.257 68.58,-9.93 ; C2.1 66.294,-71.247 65.659,-71.882 59.944,-71.882 59.602,-71.54 R9.1 59.602,-68.453 58.952,-67.803 C7.1 58.42,-62.889 C6.1 55.532,-62.729 L1.2 55.564,-54.705 C1.2 ; C10.1 68.58,-9.93 ; P6.1 68.58,-2.54 68.58,-9.93
  Bottom Layer w0.406: v1(18.669,-48.514) 19.304,-48.514 22.098,-51.308 v1(33.782,-51.308) ; v1(42.926,-48.387) 47.371,-43.942 47.371,-43.434 ; v1(57.15,-48.514) 52.451,-48.514 47.371,-43.434 ; v1(65.786,-27.051) 65.786,-34.671 62.611,-37.846 50.165,-37.846 v1(47.371,-35.052) 47.371,-43.434
VDD: C8.2 C9.1 C11.1 C14.2 C16.1 C17.2 C18.2 C19.2 ESP1.2 ESP1.6 P5.4 P6.2 P7.2 R2.2 R3.2 R5.2 R6.2 R7.2 R8.2 R26.2 R30.2 R31.1 U2.8 U3.5 U4.10 U4.19 U4.26 U4.35 U4.38 U4.57 VR1.3 | length 288.8
  Top Layer w0.203: C18.2 9.848,-20.062 U4.57 ; U4.10 18.911,-27.559 19.877,-28.525 C17.2 19.877,-30.796 v1(18.923,-31.75) ; C19.2 19.05,-6.554 19.05,-9.144 19.411,-9.505 U4.38 19.411,-15.855 19.685,-16.129 20.701,-16.129 20.911,-15.919 ; U4.35 20.911,-15.919 ; U4.19 C14.2@26.017,-22.562 ; C14.2 26.986,-22.29 v1(27.813,-21.463) 27.813,-20.574 26.301,-19.062 U4.26 21.602,-19.062 20.911,-18.371 20.911,-15.919 ; R31.1 35.091,-11.391 P7.2
  Top Layer w0.254: C14.2@26.017,-22.562 C14.2
  Top Layer w0.406: C8.2 5.809,-33.557 U3.5 ; C18.2 9.717,-21.652 2.413,-28.956 U3.5 ; ESP1.6 11.292,-47.995 8.89,-45.593 R2.2 ; U2.8 14.986,-43.053 13.628,-44.411 R30.2 R26.2 8.509,-44.411 R2.2 ; v1(19.304,-46.101) 19.304,-44.704 28.067,-35.941 33.362,-35.941 R3.2 ; v1(35.433,-15.748) 35.56,-15.875 48.768,-15.875 v1(53.467,-11.176) 53.467,-22.86 54.332,-23.725 C9.1 61.317,-23.725 P5.4 ; VR1.3 35.117,-41.223 C16.1 35.117,-37.696 R3.2 ; v1(38.481,-38.735) 37.338,-37.592 R3.2 ; R7.2 R5.2 R6.2 R8.2 55.714,-37.123 v1(57.15,-35.687) ; C11.1 63.119,-11.557 v1(65.567,-9.109) 66.929,-7.747 P6.2 ; U3.5 0.733,-33.557 0.254,-34.036 0.254,-42.821 1.629,-44.196 6.604,-44.196 7.327,-44.919 R2.2
  Bottom Layer w0.406: v1(3.683,-27.432) 14.605,-27.432 v1(18.923,-31.75) ; ESP1.2 6.818,-49.824 10.541,-46.101 v1(19.304,-46.101) ; v1(27.813,-21.463) 29.083,-22.733 32.131,-22.733 35.433,-19.431 v1(35.433,-15.748) 35.433,-11.049 P7.2 ; v1(38.481,-38.735) 38.862,-38.735 44.704,-32.893 54.356,-32.893 v1(57.15,-35.687) 57.15,-27.94 P5.4 ; v1(53.467,-11.176) 63.5,-11.176 v1(65.567,-9.109)
pads on no net: ESP1.3 ESP1.5 P2.0 Q1.4 U1.9 U1.10 U1.13 U2.7 U3.1 U4.21 U4.22 U4.23 U4.24 U4.28 U4.42 U4.44 U4.46 U4.53 U4.54 U4.55 U4.58 U4.59 U4.60 U4.61 U4.62 U4.64

## Polygon pours and split planes (outlines as drawn)
GND on Top Layer "Top Layer-No Net" (solid, remove dead copper, pour order 1000): 59.817,-59.397 59.817,-57.697 65.952,-57.697 66.294,-58.039 66.294,-59.714 66.294,-60.452 64.643,-62.103 64.922,-62.382 64.922,-65.811 67.398,-68.287 67.398,-70.485 63.334,-70.485 61.952,-69.103 61.952,-62.357 61.952,-61.532 59.817,-59.397
NetC4_1 on Top Layer "Top Layer-No Net" (solid, remove dead copper, pour order 1001): 49.968,-61.407 50.132,-61.243 50.132,-54.737 50.132,-52.799 49.53,-52.197 49.403,-52.07 46.228,-52.07 45.466,-52.07 44.831,-52.705 44.577,-52.959 44.577,-56.515 44.577,-56.896 45.085,-57.404 45.212,-57.531 48.006,-57.531 48.006,-60.579 48.641,-61.214 48.834,-61.407 49.968,-61.407
V_IN on Top Layer "Top Layer-No Net" (solid, remove dead copper, pour order 1002): 58.801,-51.943 65.532,-51.943 66.167,-51.308 66.421,-51.054 66.421,-47.625 66.421,-45.847 65.913,-45.339 61.849,-45.339 59.436,-45.339 58.928,-45.847 58.801,-45.974 58.801,-51.943
GND on Top Layer "Top Layer-No Net" (solid, remove dead copper, pour order 1003): 46.355,-41.973 40.982,-36.6 40.982,-30.988 43.646,-30.988 43.886,-30.748 46.115,-30.748 46.609,-31.242 48.514,-33.147 48.514,-33.655 46.609,-33.655
VDD on Top Layer "Top Layer-No Net" (solid, remove dead copper, pour order 1004): 37.719,-44.069 36.068,-44.069 35.179,-43.18 35.117,-43.118 35.117,-37.696 37.234,-37.696 37.338,-37.592 38.481,-38.735 38.481,-43.815 38.608,-43.942
GND on Top Layer "Top Layer-No Net" (solid, remove dead copper, pour order 1005): 55.753,-20.725 56.237,-21.209 61.341,-21.209 64.897,-21.209 66.929,-19.177 66.929,-14.581 66.929,-12.446 66.294,-11.811 66.167,-11.684 59.333,-11.684 55.88,-11.684 55.245,-12.319 55.118,-12.446 55.118,-20.828
GND on Top Layer "Top Layer-No Net" (solid, remove dead copper, pour order 1006): 24.638,-59.944 24.638,-64.516 26.062,-65.94 26.089,-65.913 46.736,-65.913 46.99,-65.913 47.498,-65.405 47.568,-65.335 47.568,-62.357 47.568,-59.633 46.736,-58.801 42.545,-54.61 40.976,-54.61 40.976,-48.088 39.878,-46.99 39.497,-46.609 29.845,-46.609 27.559,-46.609 24.511,-49.657
GND on Top Layer "Top Layer-No Net" (solid, remove dead copper, pour order 1007): 28.741,-37.592 29.718,-38.569 29.718,-39.116 32.828,-39.116 33.717,-40.005 34.925,-41.213 34.925,-45.847 29.337,-45.847 29.21,-45.974
GND on Top Layer "Top Layer-No Net" (solid, remove dead copper, pour order 1008): 41.91,-45.847 40.982,-44.919 40.982,-36.6 42.252,-36.6 47.625,-41.973 52.325,-46.673 53.975,-46.673 53.975,-49.468 54.164,-49.657 54.037,-49.784 43.18,-49.784 43.18,-48.641 40.386,-45.847
VDD on Top Layer "Top Layer-No Net" (solid, remove dead copper, pour order 1009): 0.396,-49.697 6.599,-49.697 7.339,-49.697 9.558,-47.816 10.334,-47.158 11.109,-47.158 12.815,-47.158 13.745,-46.37 14.986,-45.318 14.986,-42.821 1.34,-42.821 0.254,-43.741
GND on Top Layer "Top Layer-No Net" (solid, remove dead copper, pour order 1010): 2.031,-20.447 8.238,-20.447 8.636,-19.999 8.544,-19.896 8.544,-17.462 7.881,-16.716 7.708,-16.716 3.064,-16.716 2.135,-15.672 2.135,-8.509 0.282,-8.509 -0.381,-9.255 -0.381,-19.552 0.415,-20.447
GND on Top Layer "Top Layer-No Net" (solid, remove dead copper, pour order 1011): 15.342,-7.854 9.042,-7.854 9.042,0.025 9.779,0.762 9.906,0.889 17.399,0.889 21.336,0.889 22.225,0 22.158,-0.067 22.158,-2.23 22.158,-6.925 21.082,-8.001
NetC22_1 on Top Layer "Top Layer-No Net" (solid, remove dead copper, pour order 1012): 28.805,-10.541 27.955,-9.691 23.241,-9.691 24.677,-8.255 27.208,-5.724 27.208,-5.08 27.208,-6.126 28.829,-7.747
GND on Top Layer "Top Layer-No Net" (solid, remove dead copper, pour order 1013): 21.466,-10.859 20.828,-10.459 20.828,0.889 44.509,0.889 46.931,-0.63 47.117,-0.746 47.117,-10.922
VDD on Top Layer "Top Layer-No Net" (solid, remove dead copper, pour order 1014): 23.686,-19.062 20.713,-19.062 19.558,-17.907 19.411,-17.76 19.411,-14.287 20.911,-14.287 23.749,-14.287
GND on Top Layer "Top Layer-No Net" (solid, remove dead copper, pour order 1015): 11.811,-13.462 24.257,-13.462 24.511,-13.716 24.765,-13.97 24.765,-25.337 24.765,-25.654 24.257,-26.162 24.13,-26.289 12.446,-26.289 11.684,-25.527
GND on Top Layer "Top Layer-No Net" (solid, remove dead copper, pour order 1016): 1.016,-50.673 1.397,-51.054 15.494,-51.054 15.494,-70.993 18.034,-73.533 18.161,-73.66 68.961,-73.66 69.215,-73.66 70.866,-72.009 70.358,-71.501 70.358,-1.27 70.358,0.635 68.453,2.54 68.326,2.413 3.937,2.413 1.524,2.413 -1.016,-0.127 -1.524,-0.635 -1.524,-47.752
VDD on Bottom Layer "Top Layer-No Net" (solid, remove dead copper, pour order 1017): 57.15,-35.687 54.356,-32.893 52.705,-32.893 52.705,-26.67 55.753,-23.622 55.88,-23.749 61.341,-23.749 61.341,-28.702 60.198,-29.845 58.293,-31.75 58.293,-35.687
VCC on Bottom Layer "Top Layer-No Net" (solid, remove dead copper, pour order 1018): 42.926,-48.387 42.926,-44.45 45.339,-42.037 45.466,-41.91 48.895,-41.91 54.864,-41.91 57.023,-44.069 57.15,-44.196 57.15,-48.514 43.053,-48.514 42.926,-48.387
GND on Bottom Layer "Top Layer-No Net" (solid, remove dead copper, pour order 1019): -1.651,-47.879 -1.651,-48.133 1.397,-51.181 1.524,-51.054 15.367,-51.054 15.367,-70.612 18.415,-73.66 18.542,-73.787 69.215,-73.787 69.215,-73.66 70.866,-72.009 70.866,0.508 68.707,2.667 68.58,2.54 1.524,2.54 1.524,2.286 -1.651,-0.889

## Keep-outs
Keep-Out Layer:
  lines w0.1: -3.302,-74.803 -3.302,3.429 71.882,3.429 71.882,-74.803 -3.302,-74.803

## Text inside footprints (layer, text, board x,y; h text height)
P6: Top Overlay "12" at 52.197,-2.921 h1.27 r180; Top Overlay "1" at 51.181,-0.381 h1.27 r180; Top Overlay "1" at 52.197,-0.381 h1.27 r180; Top Overlay "1" at 69.469,-0.381 h1.27 r180; Top Overlay "2" at 69.469,-2.921 h1.27 r180